# Allegro board ZWAVE_SWITCH.brd
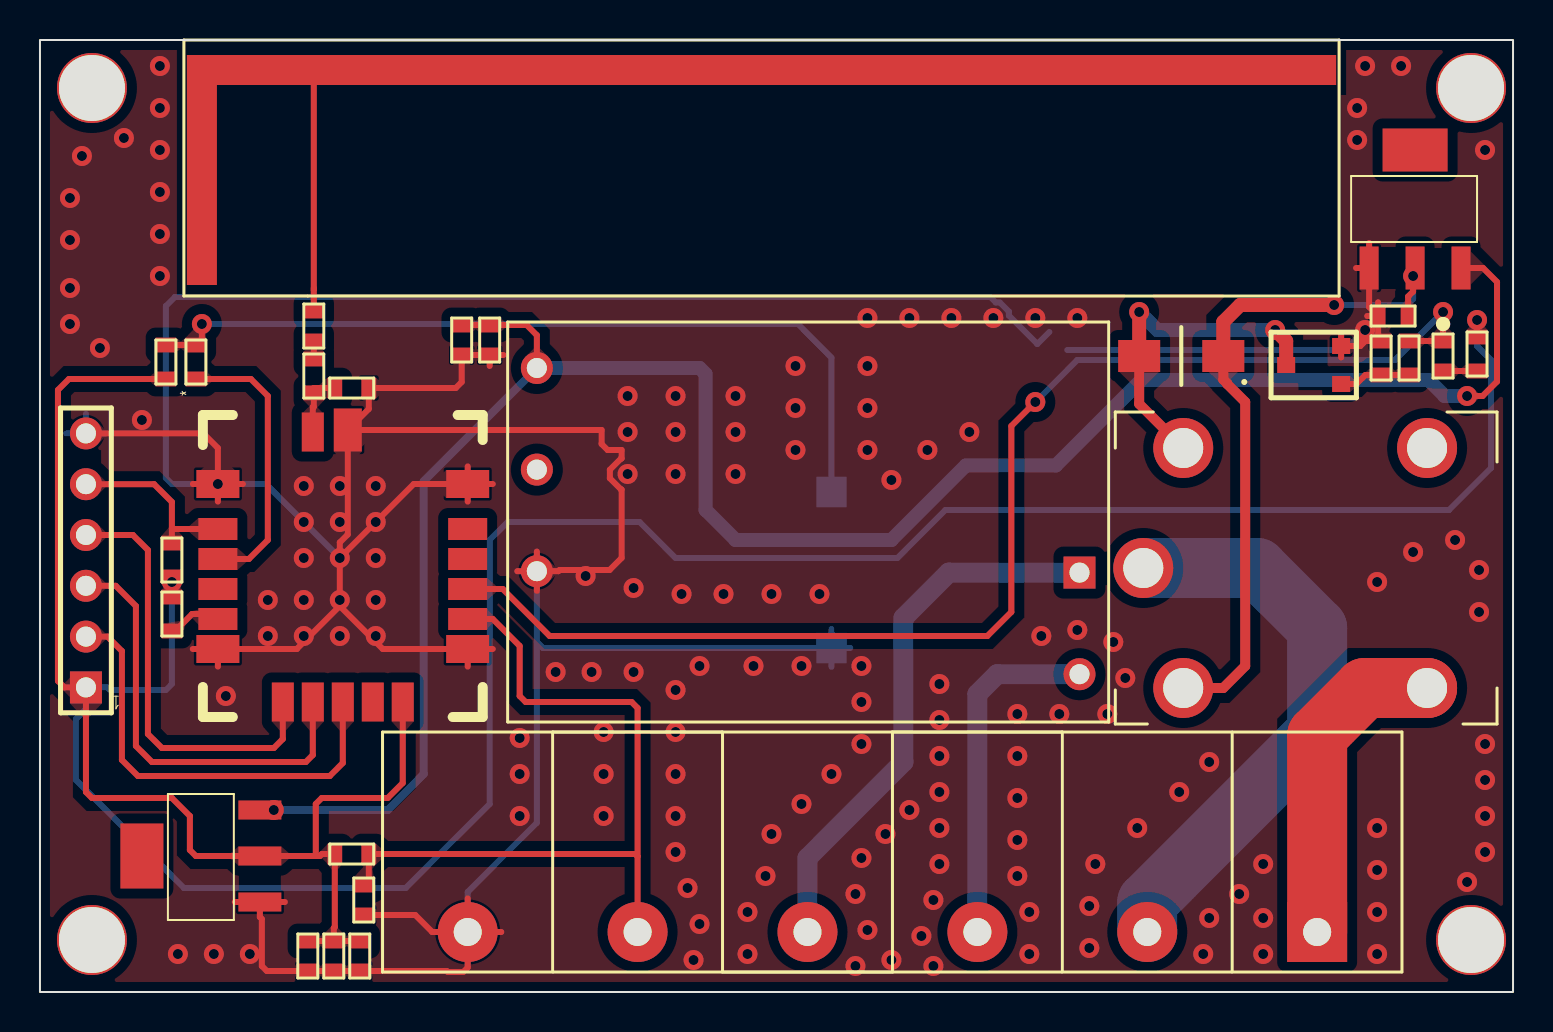
[diagram p0: board, top side]
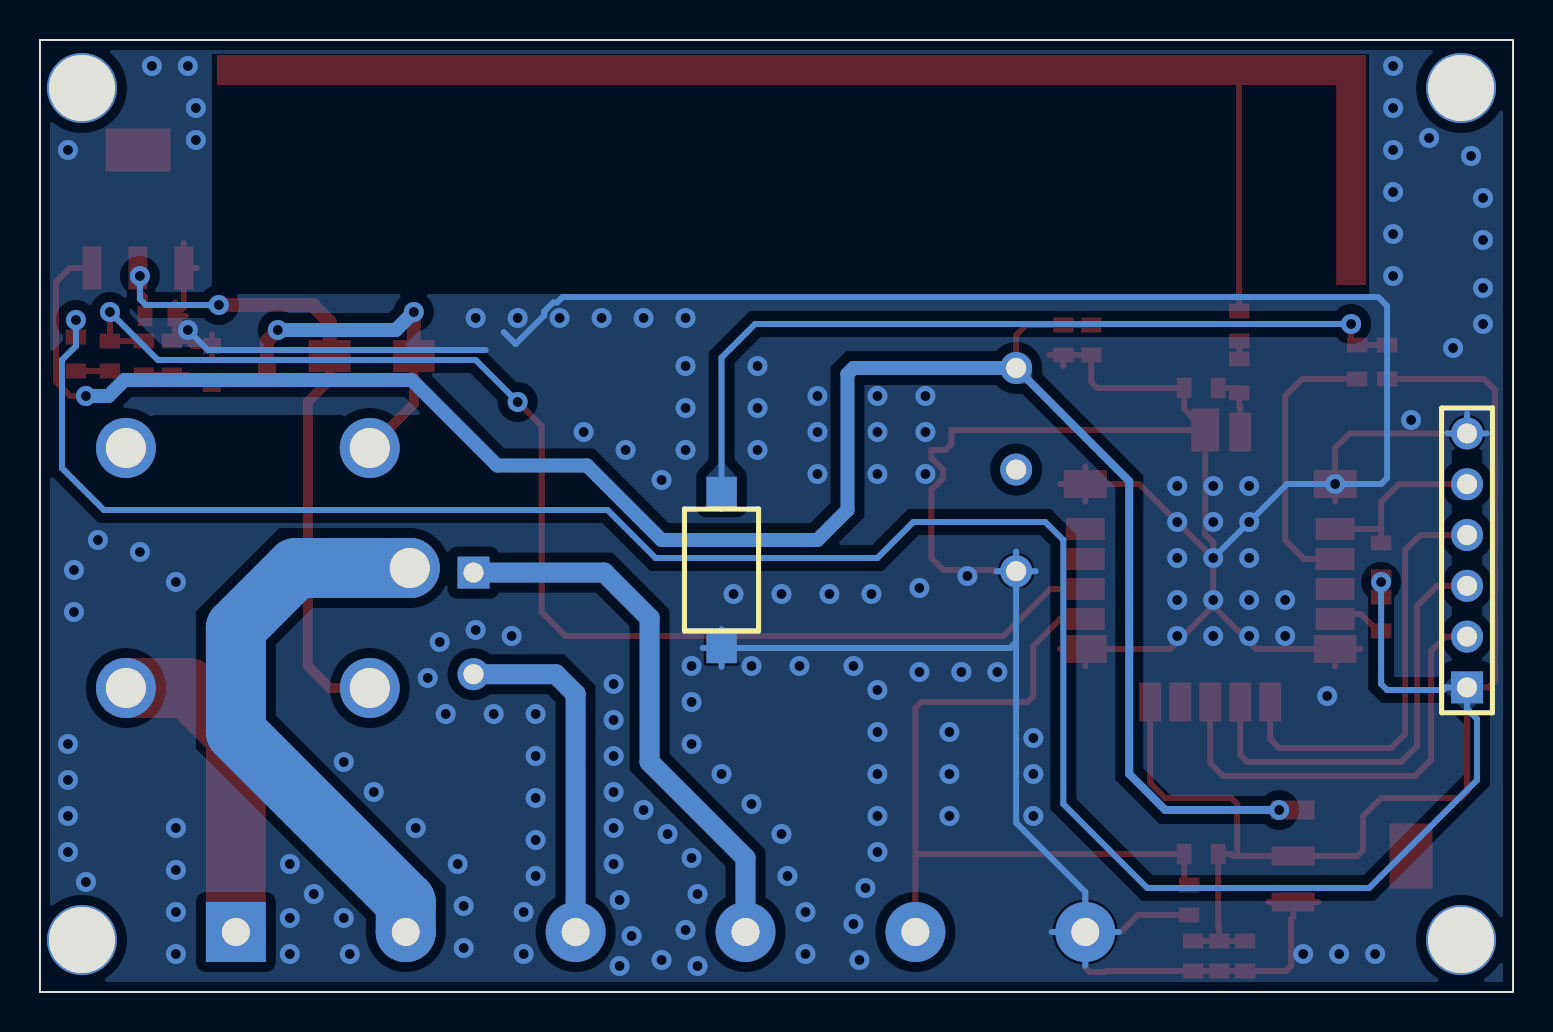
[diagram p1: board, bottom side, seen from below]

Outline 73.7 x 47.6 mm; copper layers: TOP, BOTTOM. Coordinates in mm from the lower left corner of the outline.
Outline path: rectangle 0,0 73.7,47.6

## Design rules (mm)
constraint set DEFAULT: min track width 0.3

## Placement (name value [footprint] x y rotation side)
AN1  MyAntena  [MYANTENA]  13.7 35.2 0 top
C1  104  [CAP_SMD_0603]  21.1 32.6 270 top
C2  104  [CAP_SMD_0603]  22.5 32.6 270 top
C3  104  [CAP_SMD_0603]  16 1.8 270 top
C4  104  [CAP_SMD_0603]  67.7 33.8 180 top
C6  33nF  [CAP_SMD_0603]  13.4 1.8 270 top
C7  4.7uF  [CAP_SMD_0603]  14.7 1.8 270 top
C8  3.3pF  [CAP_SMD_0603]  13.7 33.3 90 top
C9  104  [CAP_SMD_0603]  16.2 4.6 90 top
D1  PWM LED  [LED_SMD_0603]  70.2 31.8 270 top
D2  1N4007  [1N4007_SMD]  57.1 31.8 180 top
J3  CON6  [J1_6_254]  2.3 16.5 90 top
J5  CON6  [KF850_6P]  63.9 3 180 top
L1  3.9 nH  [RES_SMD_0603]  15.6 30.2 0 top
LS1  RELAY SPDT  [SONGLE_RELAY_5PINS]  63.3 21.2 90 top
M1  12V  [AC2DC_CONVERTER]  23.4 33.5 0 top
NOREF  -  [unnamed]  71.6 2.6 0 top
NOREF#2  -  [unnamed]  2.6 2.6 0 top
NOREF#3  -  [unnamed]  2.6 45.2 0 top
NOREF#4  -  [unnamed]  71.6 45.2 0 top
Q1  MMBT2222A  [SOT23]  65.1 30.4 270 top
R1  1k  [RES_SMD_0603]  68.5 31.7 90 top
R2  100k  [RES_SMD_0603]  67.1 31.7 90 top
R3  10K  [RES_SMD_0603]  6.3 31.5 90 top
R4  1k  [RES_SMD_0603]  7.8 31.5 270 top
R5  10K  [RES_SMD_0603]  6.6 18.9 270 top
R6  10K  [RES_SMD_0603]  6.6 21.6 270 top
R7  330R  [RES_SMD_0603]  71.9 31.9 270 top
R8  0R  [RES_SMD_0603]  13.7 30.8 90 top
R9  10K  [RES_SMD_0603]  15.6 6.9 0 top
SW1  SW_PB_SPST  [SMD_2PIN_BUTTON]  39.6 21.1 270 bottom
U1  AMS1117  [SOT223]  8.1 6.7 90 top
U2  AMS1117  [SOT223]  68.7 39.1 0 top
U3  ZM5202AU-CME3R  [ZM5202]  21.4 14.5 90 top

## Library data of the parts
AN1 = MyAntena
C1-C4 C6-C9 = CAPACITOR NON-POL
D1 = LED
D2 = DIODE_0
J3 J5 = CON6
L1 = INDUCTOR
LS1 = RELAY SPDT
M1 = AC2DC_Module
Q1 = NPN BEC_1
R1-R9 = R
SW1 = SW_PB_SPST
U1 U2 = ASM1117
U3 = ZM5202

## Footprints (pads in the part's own frame, mm; a bottom-side part is the same pattern mirrored in y, then rotated)
1N4007_SMD
  rect 2.1x1.6 smd: A(2.104,0) C(-2.104,0)
AC2DC_CONVERTER
  rect 1.6x1.6 hole 1: 1(28.61,-12.53)
  round 1.6 hole 1: 2(28.61,-17.61) 3(1.46,-2.3) 4(1.46,-7.38) 5(1.46,-12.46)
CAP_SMD_0603
  rect 0.74x1.02 smd: 1(-0.75,0) 2(0.75,0)
J1_6_254
  rect 1.6x1.6 hole 1: 1(-1.27,0)
  round 1.6 hole 1: 2(1.27,0) 3(3.81,0) 4(6.35,0) 5(8.89,0) 6(11.43,0)
KF850_6P
  rect 3x3 hole 1.4: 1(0,0)
  round 3 hole 1.4: 2(8.5,0) 3(17,0) 4(25.5,0) 5(34,0) 6(42.5,0)
LED_SMD_0603
  rect 0.74x1.02 smd: 1(-0.75,0) 2(0.75,0)
MYANTENA
  rect 0.3x0.3 smd: 1(0,0)
RES_SMD_0603
  rect 0.74x1.02 smd: 1(-0.85,0) 2(0.85,0)
SMD_2PIN_BUTTON
  rect 1.524x1.524 smd: 1(-3.9,0) 2(3.9,0)
SONGLE_RELAY_5PINS
  round 3 hole 2: 1(-6,6.1) 2(6,6.1) 3(0,8.1) 4(-6,-6.1) 5(6,-6.1)
SOT23
  rect 0.8x0.9 smd: 1(0,0) 2(-1.9,0) 3(-0.95,-2.75)
SOT223
  rect 3.25x2.15 smd: (0.1,3)
  rect 0.95x2.15 smd: 1(-2.201,-2.901) 2(0.099,-2.901) 3(2.399,-2.901)
unnamed
  round 3.5 hole 3.3: (0,0)
ZM5202
  rect 1.4x2.15 smd: 1(10.9,12.5) 6(2.65,12.5) 12(2.65,0) 17(10.9,0)
  rect 1.1x1.95 smd: 2(8.65,12.5) 3(7.15,12.5) 4(5.65,12.5) 5(4.15,12.5) 13(4.15,0) 14(5.65,0) 15(7.15,0) 16(8.65,0)
  rect 1.95x1.1 smd: 7(0,9.25) 8(0,7.75) 9(0,6.25) 10(0,4.75) 11(0,3.25) 19(13.5,7.75)
  rect 2.15x1.4 smd: 18(13.6,6)

## Nets
3V3: C3.1 C6.1 C7.1 J3.1 R3.1 R5.1 R6.2 R7.1 R9.1 U1.2(VOUT) U3.11
5V: C4.1 D2.C(K) LS1.1 U2.2(VOUT)
12V: C1.1 C2.1 M1.3 U1.3 U2.3
GND: C1.2 C2.2 C3.2 C4.2 C6.2 C7.2 C9.1 J3.6 J5.6 L1.2 M1.5 Q1.2(E) R2.2 SW1.2 U1.1 U2.1 U3.1 U3.6 U3.12 U3.17 U3.18
AC1: J5.4 M1.1
AC2: J5.3 M1.2(AC2)
BUTTON: C9.2 J5.5 R9.2 U3.13
MISO: J3.4 U3.7
MOSI: J3.2 U3.9
PWM: D1.1(CATHODE) R1.2 U3.14
RL1: J5.2 LS1.3
RL2: J5.1 LS1.4(NO)
SCK: J3.3 U3.8
ZWAVE_RESET: J3.5 R6.1 U3.2
N49770: R3.2 R4.1 SW1.1
N49928: R4.2 U3.3
N50646: R5.2 U3.5
N53653: Q1.1 R1.1 R2.1
N53737: D2.A LS1.2 Q1.3
N349270: L1.1 R8.1 U3.19
N349634: AN1.1(AN) C8.2
N502261: D1.2 R7.2
N3491880: C8.1 R8.2

Pads without a net: LS1 5; M1 4; U3 4 10 15 16

## Via types
v1: diameter 1, hole 0.5, TOP to BOTTOM, 167 vias

## Routing (per net, layer and track width the routed paths; a pad name or vN(x,y) marks a point on that pad's centre or on a via; arc(x,y) is an arc through that point)
3V3: length 175.1
  TOP w0.3: 13.8,6.8 13.8,9.4 14.1,9.7 17.4,9.7 18.15,10.45 U3.11 ; 13.8,6.8 14,6.8 14.1,6.9 R9.1 14.75,3.25 14.7,3.2 C7.1 ; 13.8,6.8 U1.2 7.8,6.8 7.5,7.1 7.5,8.8 6.6,9.7 2.6,9.7 2.3,10 J3.1 1.22,15.23 0.9,15.55 0.9,30.1 1.45,30.65 R3.1 ; C7.1 C6.1 ; C7.1 C3.1 ; R6.2 v1(6.6,20.5) R5.1 ; R7.1 v1(71.9,33.6)
  BOTTOM w0.3: v1(71.9,33.6) 71.9,32.3 72.6,31.6 72.6,26.2 70.5,24.1 45.3,24.1 42.9,21.7 31.8,21.7 30,23.5 23.4,23.5 22.5,22.6 22.5,9.4 18.3,5.2 7.2,5.2 1.8,10.6 1.8,13.65 2.3,14.15 J3.1 3.38,15.23 3.51,15.1 6.3,15.1 6.6,15.4 v1(6.6,20.5)
5V: length 34.4
  TOP w0.3: C4.1 68.45,34.77 68.7,35.02 v1(68.7,35.8)
  TOP w0.5: LS1.1 59.2,15.2 60.3,16.3 60.3,29.5 59.4,30.4 59.4,30.43 59.2,30.62 D2.C
  TOP w0.7: v1(64.75,34.35) 60.05,34.35 59.2,33.5 D2.C
  BOTTOM w0.3: v1(64.75,34.35) 68.4,34.35 68.7,34.65 v1(68.7,35.8)
12V: length 103.8
  TOP w0.3: C1.1 C2.1 24.35,33.35 24.86,32.84 M1.3 ; v1(71.4,29.8) 72.18,29.8 72.9,30.52 72.9,35.5 72.2,36.2 U2.3 ; U1.3 v1(11.7,9.1)
  BOTTOM w0.4: M1.3 19.2,25.54 19.2,10.9 17.4,9.1 v1(11.7,9.1)
  BOTTOM w0.7: M1.3 33,31.2 33.3,30.9 33.3,24.1 34.8,22.6 42.6,22.6 46.33,26.33 50.83,26.33 55.1,30.6 69.47,30.6 70.27,29.8 v1(71.4,29.8)
GND: length 256
  TOP w0.3: Q1.2 65.83,32.3 ; Q1.2 65.1,31.72 ; Q1.2 65.1,32.88 ; 65.83,32.3 66.3,32.77 v1(66.3,33.1) ; 65.83,32.3 66.06,32.3 66.31,32.55 R2.2 66.95,32.7 C4.2 ; M1.5 24.86,22.02 ; M1.5 23.88,21.04 ; M1.5 24.86,20.06 ; M1.5 25.94,21.04 26,21.1 28.5,21.1 29.1,21.7 29.1,25.12 29.08,25.12 28.51,25.69 28.51,26.11 29.08,26.68 29.1,26.68 29.1,27.1 28.4,27.1 28.1,27.4 28.1,28.1 U3.18 ; 8.9,24.52 v1(8.9,25.4) ; v1(8.9,25.4) 8.9,27.2 8.17,27.93 J3.6 ; v1(8.9,25.4) 10.15,25.4 ; v1(8.9,25.4) 7.65,25.4 ; C4.2 66.5,34.25 U2.1 ; C4.2 66.4,33.8 ; C4.2 66.95,34.49 ; J5.6 21.4,1.22 21.18,1 20.4,1 20.35,1.05 C3.2 C7.2 C6.2 11.35,1.05 11.1,1.3 11.1,3.65 11,3.75 U1.1 ; J5.6 19.62,3 18.77,3.85 C9.1 ; J5.6 21.4,4.68 ; J5.6 23.08,3 ; 15,19.3 17.15,17.15 U3.12 ; 15,19.3 v1(15,19.6) v1(15,21.7) ; 15,19.3 12.85,17.15 U3.6 ; U3.6 8.9,16.27 ; U3.6 7.65,17.15 ; 65.85,36.2 U2.1 ; U2.1 66.5,37.45 ; 22.5,31.3 C2.2 ; C2.2 23.19,31.85 ; C2.2 C1.2 21.1,30.5 20.8,30.2 L1.2 16.45,29.15 U3.18 ; v1(15,21.7) 15,22.48 15.4,22.88 U3.18 ; v1(15,21.7) v1(16.8,23.5) 18.7,25.4 U3.17 ; U1.1 9.75,4.5 ; U1.1 12.25,4.5 ; U3.17 22.65,25.4 ; U3.17 21.4,26.28 ; U3.17 21.4,24.52 ; U3.12 21.4,16.27 ; U3.12 22.65,17.15
  BOTTOM w0.3: 51.4,32.1 65.3,32.1 v1(66.3,33.1) ; M1.5 25.84,21.04 ; M1.5 23.88,21.04 ; M1.5 24.86,17.5 ; M1.5 24.86,22.02 ; SW1.2 40.54,17.2 ; SW1.2 25.16,17.2 24.86,17.5 ; SW1.2 39.6,16.26 ; SW1.2 39.6,18.14 ; 24.86,17.5 24.86,8.46 21.4,5 J5.6 ; v1(15,21.7) v1(13.2,23.5) 11.3,25.4 v1(8.9,25.4) 6.6,25.4 6.3,25.7 6.3,34.3 6.75,34.75 47.55,34.75 47.82,34.48 48.02,34.48 48.48,34.02 48.48,33.82 49.9,32.4 50.5,33 ; J5.6 21.4,1.32 ; J5.6 19.72,3 ; J5.6 23.08,3 ; J3.6 2.3,28.91 ; J3.6 1.32,27.93 ; J3.6 3.28,27.93
  vias: v1(1.5,39.7) v1(1.5,37.6) v1(1.5,35.2) v1(1.5,33.4) v1(2.1,41.8) v1(3,32.2) v1(4.2,42.7) v1(5.1,28.6) v1(6,46.3) v1(6,44.2) v1(6,42.1) v1(6,40) v1(6,37.9) v1(6,35.8) v1(6.9,1.9) v1(8.7,1.9) v1(9.3,14.8) v1(10.5,1.9) v1(11.4,19.6) v1(11.4,17.8) v1(13.2,25.3) v1(13.2,21.7) v1(13.2,19.6) v1(13.2,17.8) v1(15,25.3) v1(15,23.5) v1(15,17.8) v1(16.8,25.3) v1(16.8,21.7) v1(16.8,19.6) v1(16.8,17.8) v1(24,12.7) v1(24,10.9) v1(24,8.8) v1(25.8,16) v1(27.3,20.8) v1(27.6,16) v1(28.2,13) v1(28.2,10.9) v1(28.2,8.8) v1(29.4,29.8) v1(29.4,28) v1(29.4,25.9) v1(29.7,20.2) v1(29.7,16) v1(31.8,29.8) v1(31.8,28) v1(31.8,25.9) v1(31.8,15.1) v1(31.8,13) v1(31.8,10.9) v1(31.8,8.8) v1(31.8,7) v1(32.1,19.9) v1(32.4,5.2) v1(32.7,1.6) v1(33,16.3) v1(33,3.4) v1(34.2,19.9) v1(34.8,29.8) v1(34.8,28) v1(34.8,25.9) v1(35.4,4) v1(35.4,1.9) v1(35.7,16.3) v1(36.3,5.8) v1(36.6,19.9) v1(36.6,7.9) v1(37.8,31.3) v1(37.8,29.2) v1(37.8,27.1) v1(38.1,16.3) v1(38.1,9.4) v1(39,19.9) v1(39.6,10.9) v1(40.8,4.9) v1(40.8,1.3) v1(41.1,16.3) v1(41.1,14.5) v1(41.1,12.4) v1(41.1,6.7) v1(41.4,33.7) v1(41.4,31.3) v1(41.4,29.2) v1(41.4,27.1) v1(41.4,3.1) v1(42.3,7.9) v1(42.6,25.6) v1(42.6,1.6) v1(43.5,33.7) v1(43.5,9.1) v1(44.1,2.8) v1(44.4,27.1) v1(44.7,4.6) v1(44.7,1.3) v1(45,15.4) v1(45,13.6) v1(45,11.8) v1(45,10) v1(45,8.2) v1(45,6.4) v1(45.6,33.7) v1(46.5,28) v1(47.7,33.7) v1(48.9,13.9) v1(48.9,11.8) v1(48.9,9.7) v1(48.9,7.6) v1(48.9,5.8) v1(49.5,4) v1(49.5,1.9) v1(49.8,33.7) v1(50.1,17.8) v1(51,13.9) v1(51.9,33.7) v1(51.9,18.1) v1(52.5,4.3) v1(52.5,2.2) v1(52.8,6.4) v1(53.4,13.9) v1(53.7,17.5) v1(54.3,15.7) v1(54.9,8.2) v1(57,10) v1(58.2,1.9) v1(58.5,11.5) v1(58.5,3.7) v1(60,4.9) v1(61.2,6.4) v1(61.2,3.7) v1(61.2,1.9) v1(65.9,44.2) v1(65.9,42.6) v1(66.3,46.3) v1(66.9,20.5) v1(66.9,8.2) v1(66.9,6.1) v1(66.9,4) v1(66.9,1.9) v1(68.1,46.3) v1(68.7,22) v1(70.8,22.6) v1(71.4,5.5) v1(72,21.1) v1(72,19) v1(72.3,42.1) v1(72.3,12.4) v1(72.3,10.6) v1(72.3,8.8) v1(72.3,7)
AC1: length 27.4
  BOTTOM w1: M1.1 45.47,20.97 43.2,18.7 43.2,11.5 38.4,6.7 J5.4
AC2: length 17.4
  BOTTOM w1: M1.2 47.89,15.89 46.9,14.9 J5.3
BUTTON: length 38.2
  TOP w0.3: C9.2 16.45,5.6 R9.2 29.78,6.9 29.9,6.78 ; U3.13 22.65,18.65 24,17.3 24,14.8 24.3,14.5 29.6,14.5 29.9,14.2 29.9,6.78 ; 29.9,6.78 J5.5
MISO: length 21.7
  TOP w0.3: U3.7 12.15,12.65 11.7,12.2 6.1,12.2 5.4,12.9 5.4,22.1 4.65,22.85 J3.4
MOSI: length 22.2
  TOP w0.3: J3.2 3.38,17.77 4.1,17.05 4.1,11.6 4.9,10.8 14.5,10.8 15.15,11.45 U3.9
PWM: length 65.1
  TOP w0.3: v1(70.2,34) D1.1 R1.2 ; U3.14 23.15,20.15 25.5,17.8 47.4,17.8 48.6,19 48.6,28.3 v1(49.8,29.5)
  BOTTOM w0.3: v1(70.2,34) 67.8,31.6 51.9,31.6 v1(49.8,29.5)
RL1: length 28.7
  BOTTOM w3: LS1.3 60.9,21.2 63.9,18.2 63.9,13 55.4,4.5 J5.2
RL2: length 16.3
  TOP w3: LS1.4 66.27,15.2 63.9,12.83 J5.1
SCK: length 21.9
  TOP w0.3: J3.3 3.79,20.31 4.8,19.3 4.8,12.3 5.6,11.5 13.3,11.5 13.65,11.85 U3.8
ZWAVE_RESET: length 9
  TOP w0.3: U3.2 6.65,23.15 6.6,23.2 ; 6.6,23.2 6.6,24.5 5.71,25.39 J3.5 ; 6.6,23.2 R6.1
N49770: length 41.6
  TOP w0.3: v1(8.1,33.4) 8.1,32.65 R4.1 R3.2
  BOTTOM w0.3: SW1.1 39.6,31.72 37.92,33.4 v1(8.1,33.4)
N49928: length 14
  TOP w0.3: U3.3 10.45,21.65 11.4,22.6 11.4,29.8 10.55,30.65 R4.2
N50646: length 2.8
  TOP w0.3: U3.5 8.65,18.9 7.61,18.9 6.76,18.05 R5.2
N53653: length 3.6
  TOP w0.3: Q1.1 65.86,30.4 66.31,30.85 R2.1 R1.1
N53737: length 16.9
  TOP w0.5: D2.A 55,29.4 LS1.2
  TOP w0.7: D2.A v1(55,34) ; v1(61.8,33.1) 62.35,32.55 Q1.3
  BOTTOM w0.7: v1(55,34) 55.9,33.1 v1(61.8,33.1)
N349270: length 3.3
  TOP w0.3: U3.19 13.65,29.25 13.7,29.25 R8.1 13.7,30.2 L1.1
N349634: length 1.2
  TOP w0.3: C8.2 AN1.1
N502261: length 1.7
  TOP w0.3: D1.2 R7.2
N3491880: length 0.9
  TOP w0.3: R8.2 C8.1

## Copper pours and planes (outline as drawn; the poured copper is in the pictures)
GND on TOP: 0.5,0.5 0.5,47.1 73.2,47.1 73.2,0.5 ; 8 cut-outs
GND on BOTTOM: 0.5,0.5 0.5,47.1 73.2,47.1 73.2,0.5 ; 2 cut-outs
Net_1 on TOP (solid shape): 64.85,45.35 13.85,45.35 13.85,35.35 13.55,35.35 13.55,45.35 8.85,45.35 8.85,35.35 7.35,35.35 7.35,46.85 64.85,46.85

Small or netless copper shapes (teardrops, artwork), in the pictures only: 96 on TOP, 20 on BOTTOM
